# Allegro board SATROT-2-POWERBOARD-6.brd
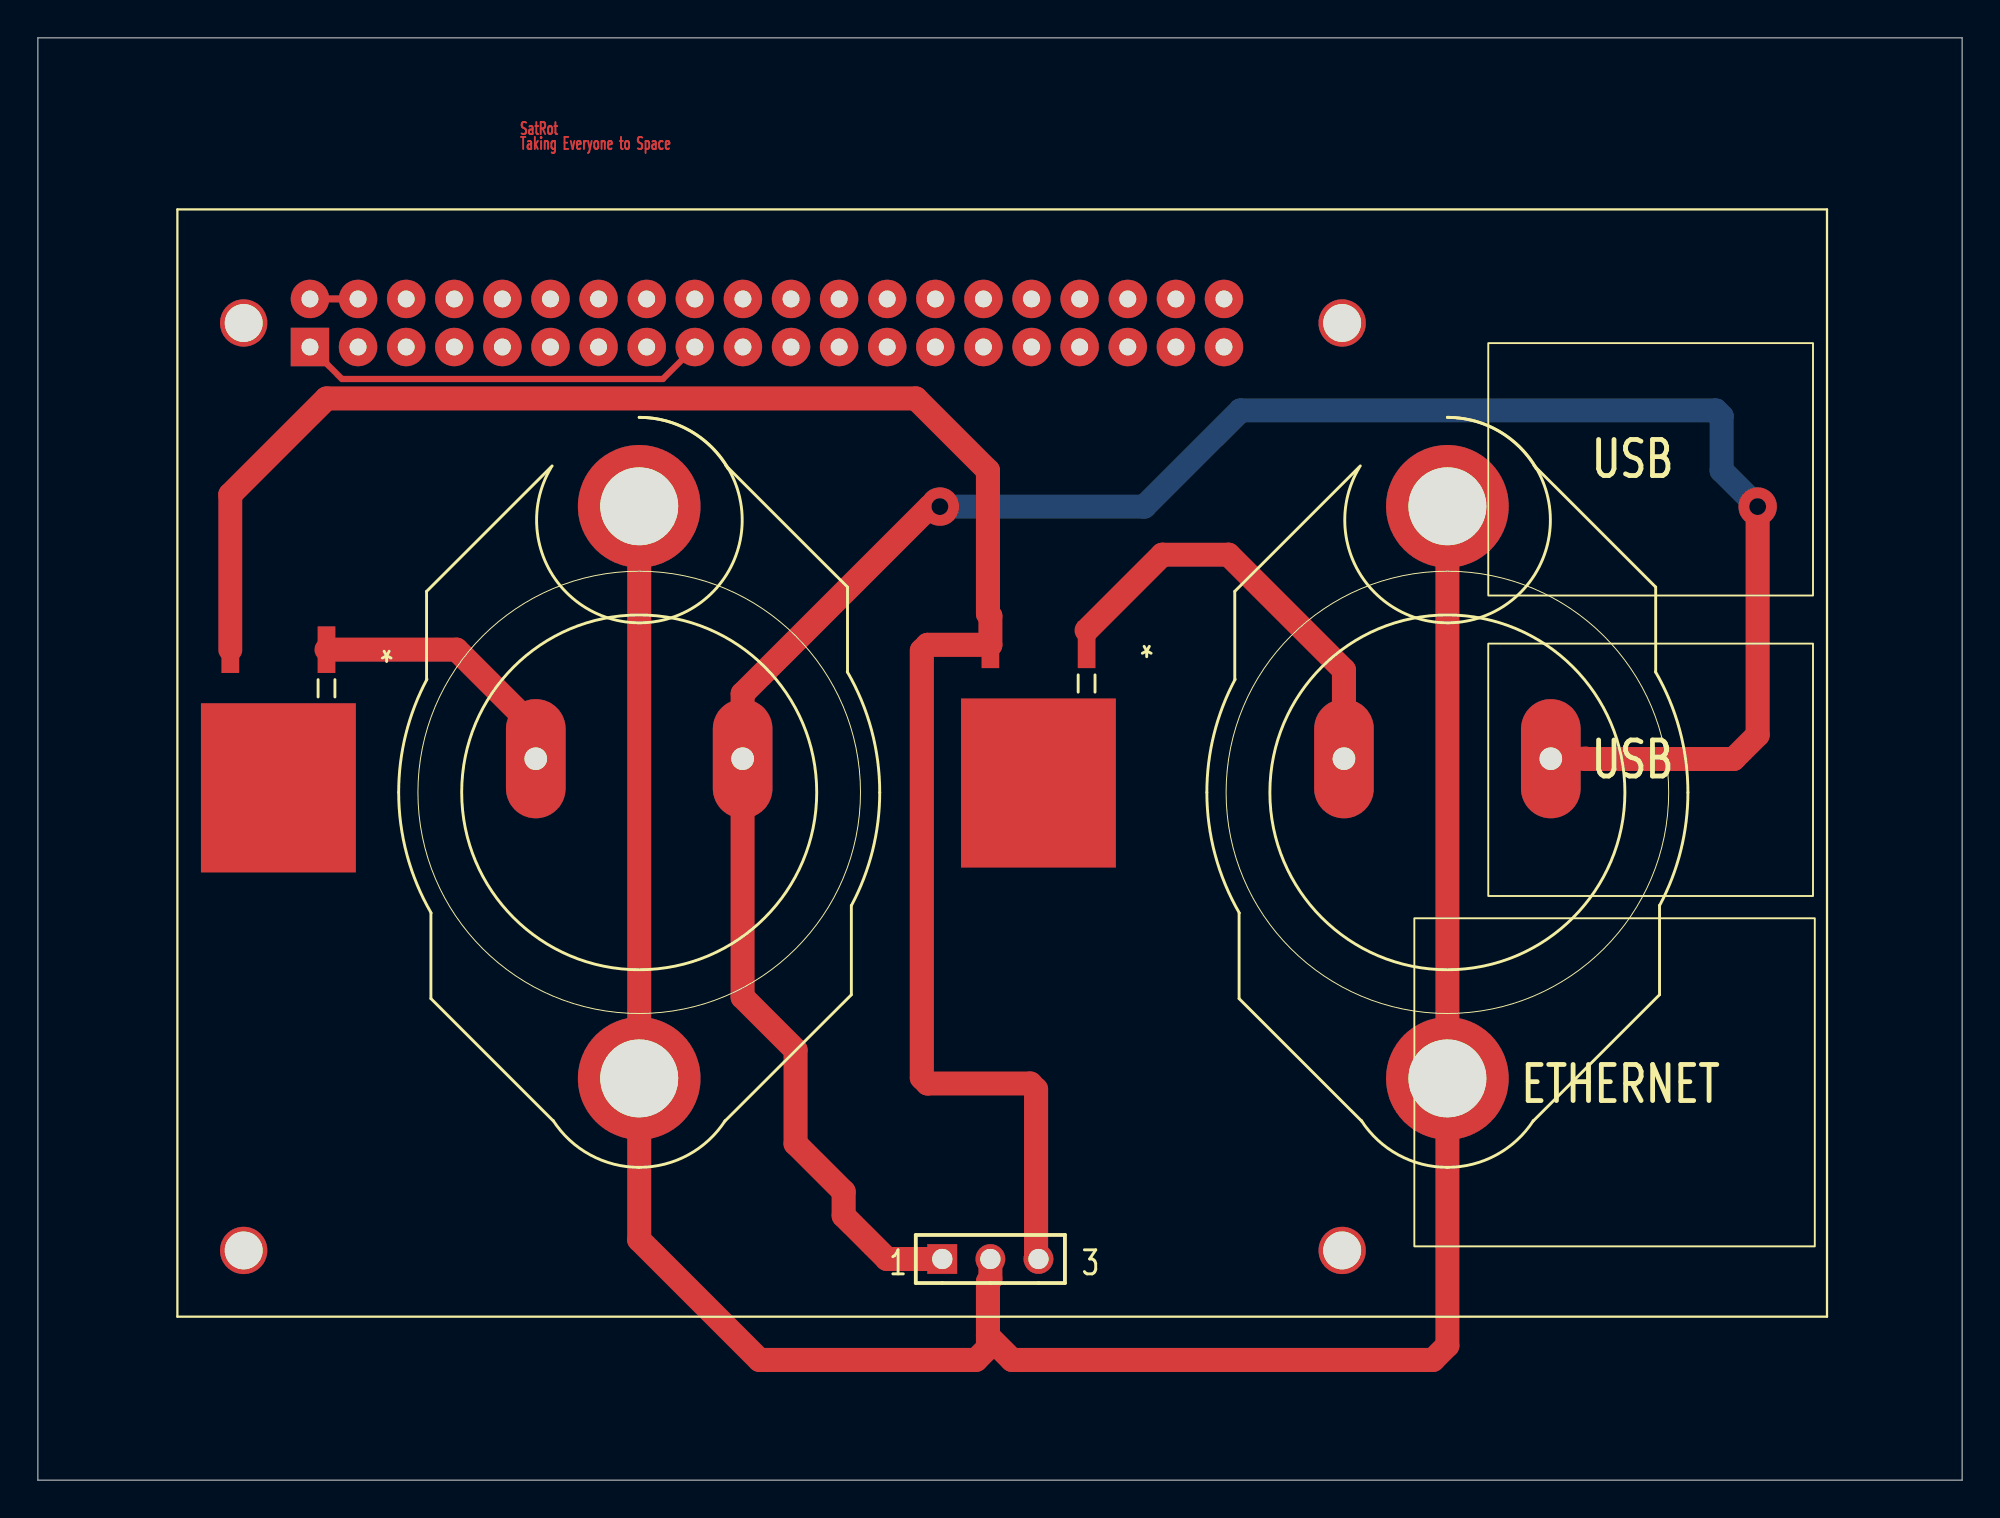
[diagram p0: board, top side]
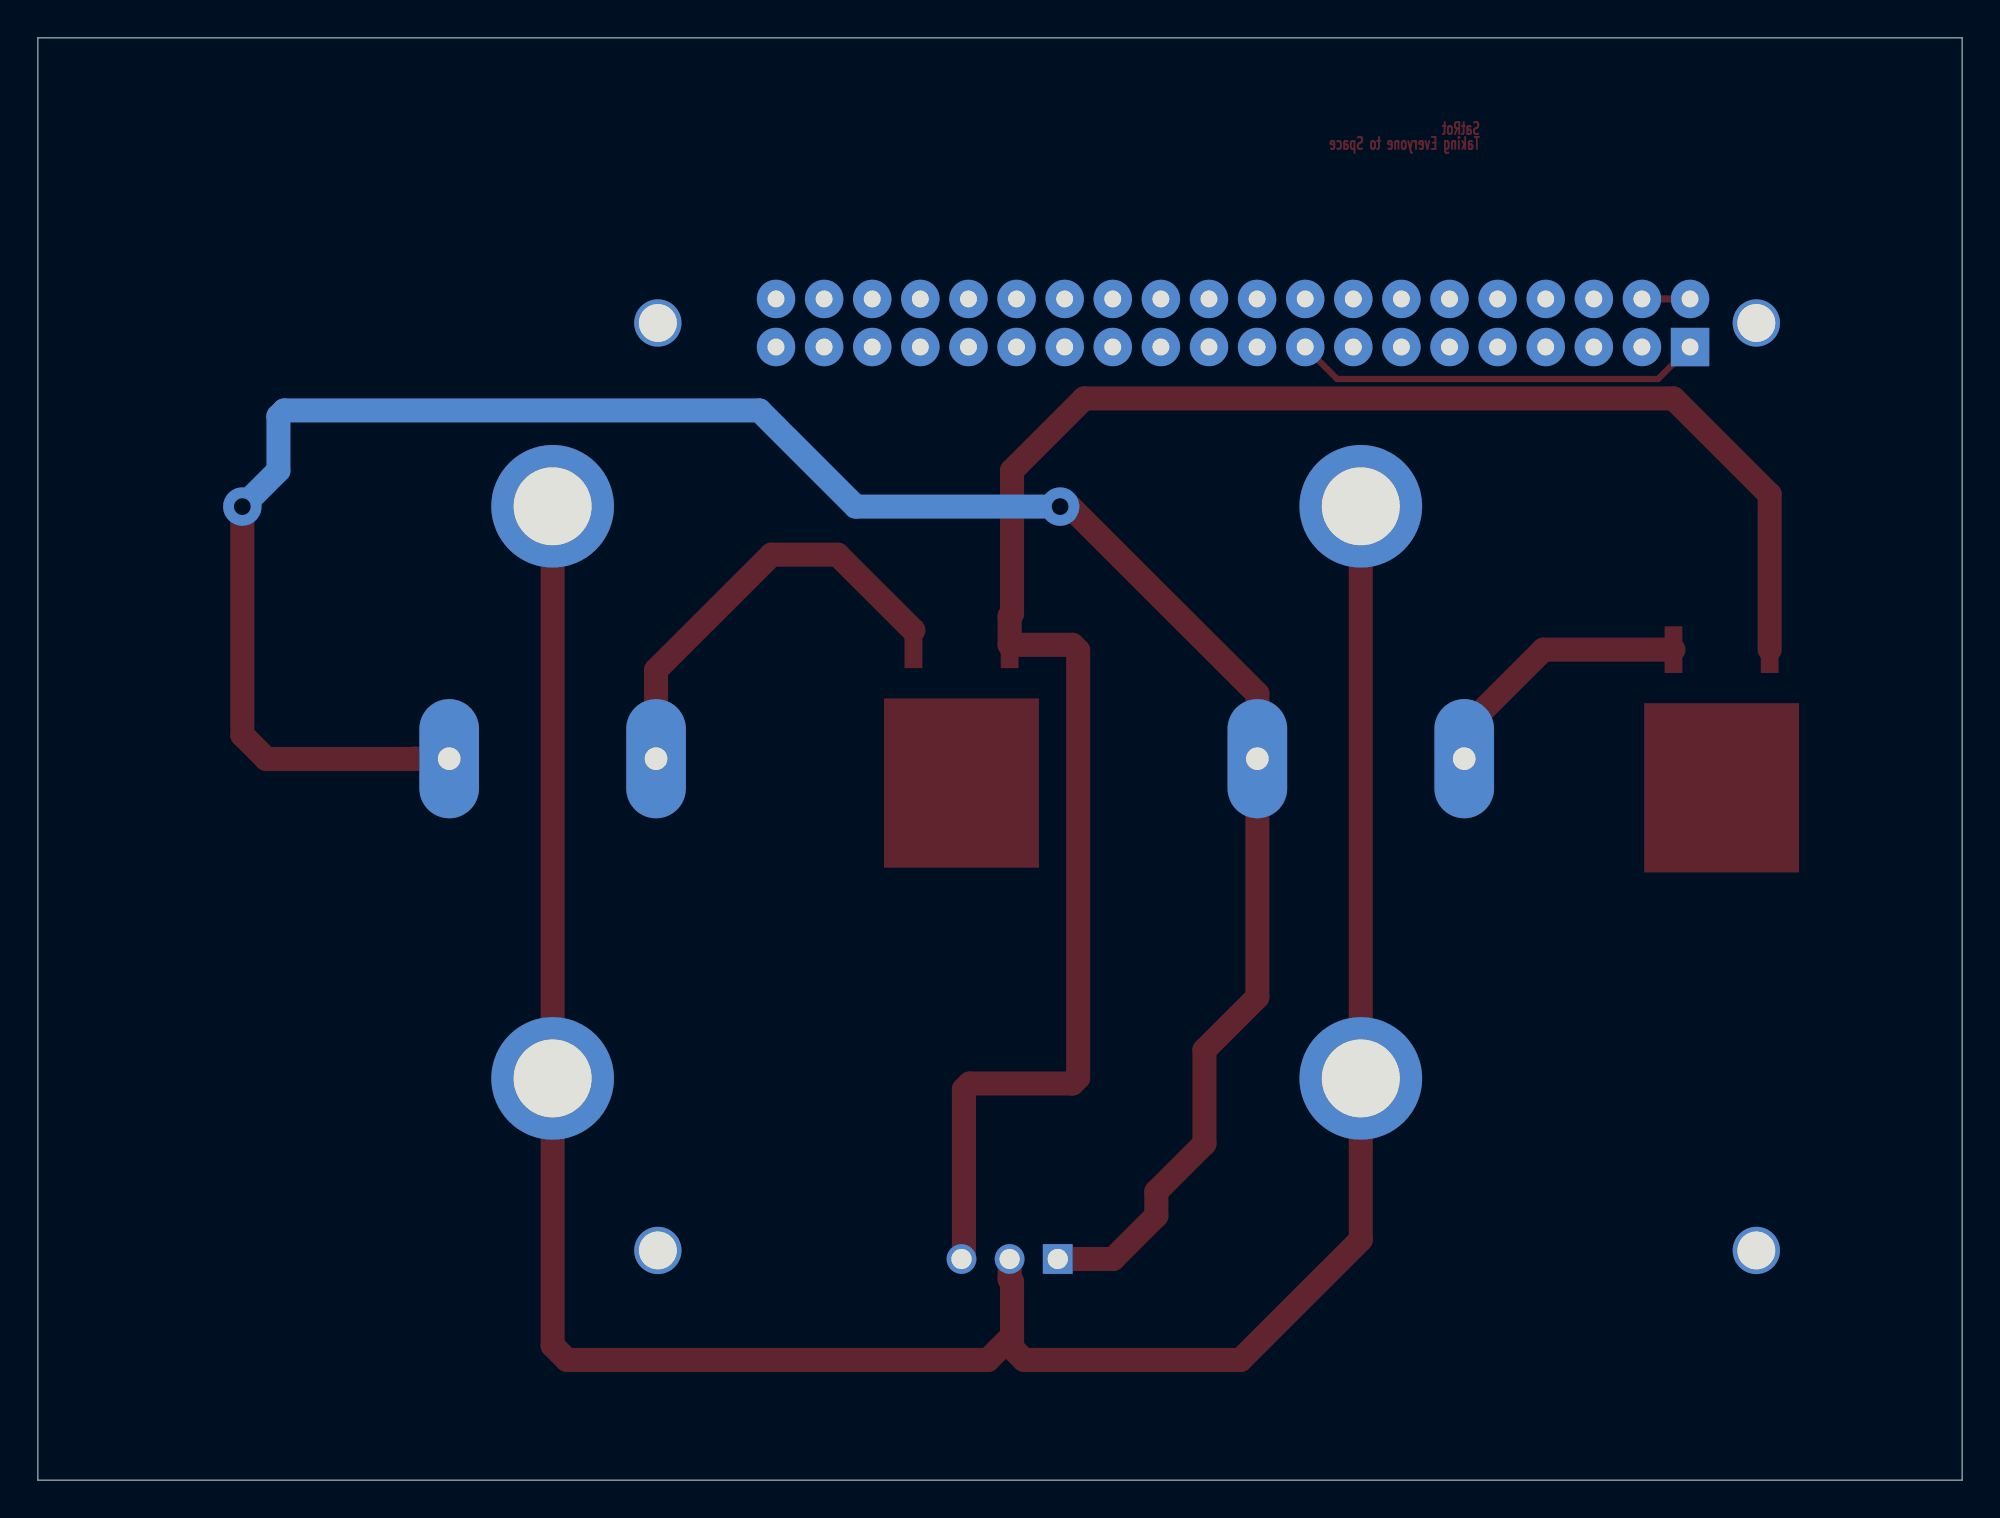
[diagram p1: board, bottom side, seen from below]

Outline 101.6 x 76.2 mm; copper layers: TOP, BOTTOM. Coordinates in mm from the lower left corner of the outline.
Outline path: 0,76.2 101.6,76.2 101.6,0 0,0 0,76.2

## Design rules (mm)
constraint set DEFAULT: min track width 0.305

## Placement (name value [footprint] x y rotation side)
J22  CON3  [BLKCON100VHTM1SQSW1003]  47.75 11.68 0 top
Q5  2N3055  [TO3]  74.42 37.34 270 top
Q6  2N3055  [TO3]  31.75 37.34 270 top
R35  0.1, 10W  [BO_PWR163]  52.83 36.83 180 top
R36  0.1, 10W  [BO_PWR163]  12.7 36.58 180 top
U9  Raspberry Pi B+  [GU-RASP-PI-3]  7.37 8.64 0 top

## Library data of the parts
J22 = CON3
Q5 Q6 = NPN
R35 R36 = PWR163S-25-15R0F: User Part Number: PN; Tolerance: TOL
U9 = Raspberry Pi B+

## Footprints (pads in the part's own frame, mm; a bottom-side part is the same pattern mirrored in y, then rotated)
BLKCON100VHTM1SQSW1003
  rect 1.575x1.575 hole 1.067: 1(0,0)
  round 1.575 hole 1.067: 2(2.54,0) 3(5.08,0)
BO_PWR163
  rect 0.94x2.464 smd: 1(-2.54,-7.303) 2(2.54,-7.303)
  rect 8.179x8.941 smd: 3(0,0)
GU-RASP-PI-3
  round 2.5 hole 2 unplated: (3.5,52.5) (3.5,3.5) (61.5,52.5) (61.5,3.5)
  rect 2.032x2.032 hole 0.889: 1(7,51.23)
  round 2.032 hole 0.889: 2(7,53.77) 3(9.54,51.23) 4(9.54,53.77) 5(12.08,51.23) 6(12.08,53.77) 7(14.62,51.23) 8(14.62,53.77) 9(17.16,51.23) 10(17.16,53.77) 11(19.7,51.23) 12(19.7,53.77) 13(22.24,51.23) 14(22.24,53.77) 15(24.78,51.23) 16(24.78,53.77) 17(27.32,51.23) 18(27.32,53.77) 19(29.86,51.23) 20(29.86,53.77) 21(32.4,51.23) 22(32.4,53.77) 23(34.94,51.23) 24(34.94,53.77) 25(37.48,51.23) 26(37.48,53.77) 27(40.02,51.23) 28(40.02,53.77) 29(42.56,51.23) 30(42.56,53.77) 31(45.1,51.23) 32(45.1,53.77) 33(47.64,51.23) 34(47.64,53.77) 35(50.18,51.23) 36(50.18,53.77) 37(52.72,51.23) 38(52.72,53.77) 39(55.26,51.23) 40(55.26,53.77)
TO3
  oval 6.299x3.15 hole 1.194: B(-0.778,5.461) E(-0.778,-5.461)
  round 6.477 hole 4.115: C(16.113,0) C/(-14.113,0)

## Nets
GND1: U9.6
GND3: U9.14
GND4: U9.20
GND5: U9.25
GND6: U9.30
GND7: U9.34
GND8: U9.39
P3V3: U9.1 U9.17
P5V: U9.2 U9.4(P5V#4)
N15005: J22.1 Q5.B Q6.B
N15011: J22.2 Q5.C Q5.C/ Q6.C Q6.C/
N15094: J22.3 R35.2 R36.2
N465950: Q6.E R36.1
N466640: Q5.E R35.1

Pads without a net: R35 3; R36 3; U9 3 5 7 8 9 10 11 12 13 15 16 18 19 21 22 23 24 26 27 28 29 31 32 33 35 36 37 38 40

## Via types
v1: diameter 2.032, hole 0.889, TOP to BOTTOM, 2 vias

## Routing (per net, layer and track width the routed paths; a pad name or vN(x,y) marks a point on that pad's centre or on a via; arc(x,y) is an arc through that point)
P3V3: length 21.7
  TOP w0.33: U9.1 16.06,58.18 33,58.18 U9.17
P5V: length 2.5
  TOP w0.381: U9.2 U9.4
N15005: length 123
  TOP w1.27: Q5.B 81.74,38.12 81.75,38.1 89.53,38.1 90.81,39.37 v1(90.81,51.44) ; J22.1 44.83,11.68 42.55,13.97 42.55,15.24 40.01,17.78 40.01,22.72 37.21,25.52 Q6.B 37.21,41.55 47.1,51.44 v1(47.62,51.44)
  BOTTOM w1.27: v1(47.62,51.44) 58.42,51.44 63.5,56.52 88.6,56.52 88.9,56.21 88.9,53.34 v1(90.81,51.44)
N15011: length 134.2
  TOP w1.27: 50.16,7.62 50.16,6.99 49.53,6.35 38.1,6.35 31.75,12.7 Q6.C Q6.C/ ; 50.16,7.62 51.44,6.35 73.66,6.35 74.42,7.11 Q5.C Q5.C/ ; 50.16,7.62 50.16,10.49 50.29,10.62 J22.2
N15094: length 102.8
  TOP w1.27: J22.3 52.7,11.81 52.7,20.65 52.4,20.95 46.98,20.95 46.67,21.26 46.67,43.83 46.98,44.13 R35.2 50.29,45.64 50.16,45.77 50.16,53.34 46.35,57.15 15.24,57.15 10.16,52.07 R36.2
N465950: length 14.4
  TOP w0.305: Q6.E 26.29,39.69
  TOP w1.27: R36.1 22.1,43.88 26.29,39.69
N466640: length 23.2
  TOP w0.305: 55.37,44.89 R35.1
  TOP w1.27: 55.37,44.89 59.37,48.9 62.87,48.9 68.96,42.8 Q5.E

## Text on the board
TOP: SatRot | Taking Everyone to Space
